# EAGLE board BoB Brain v03 (EAGLE 7.5.0)
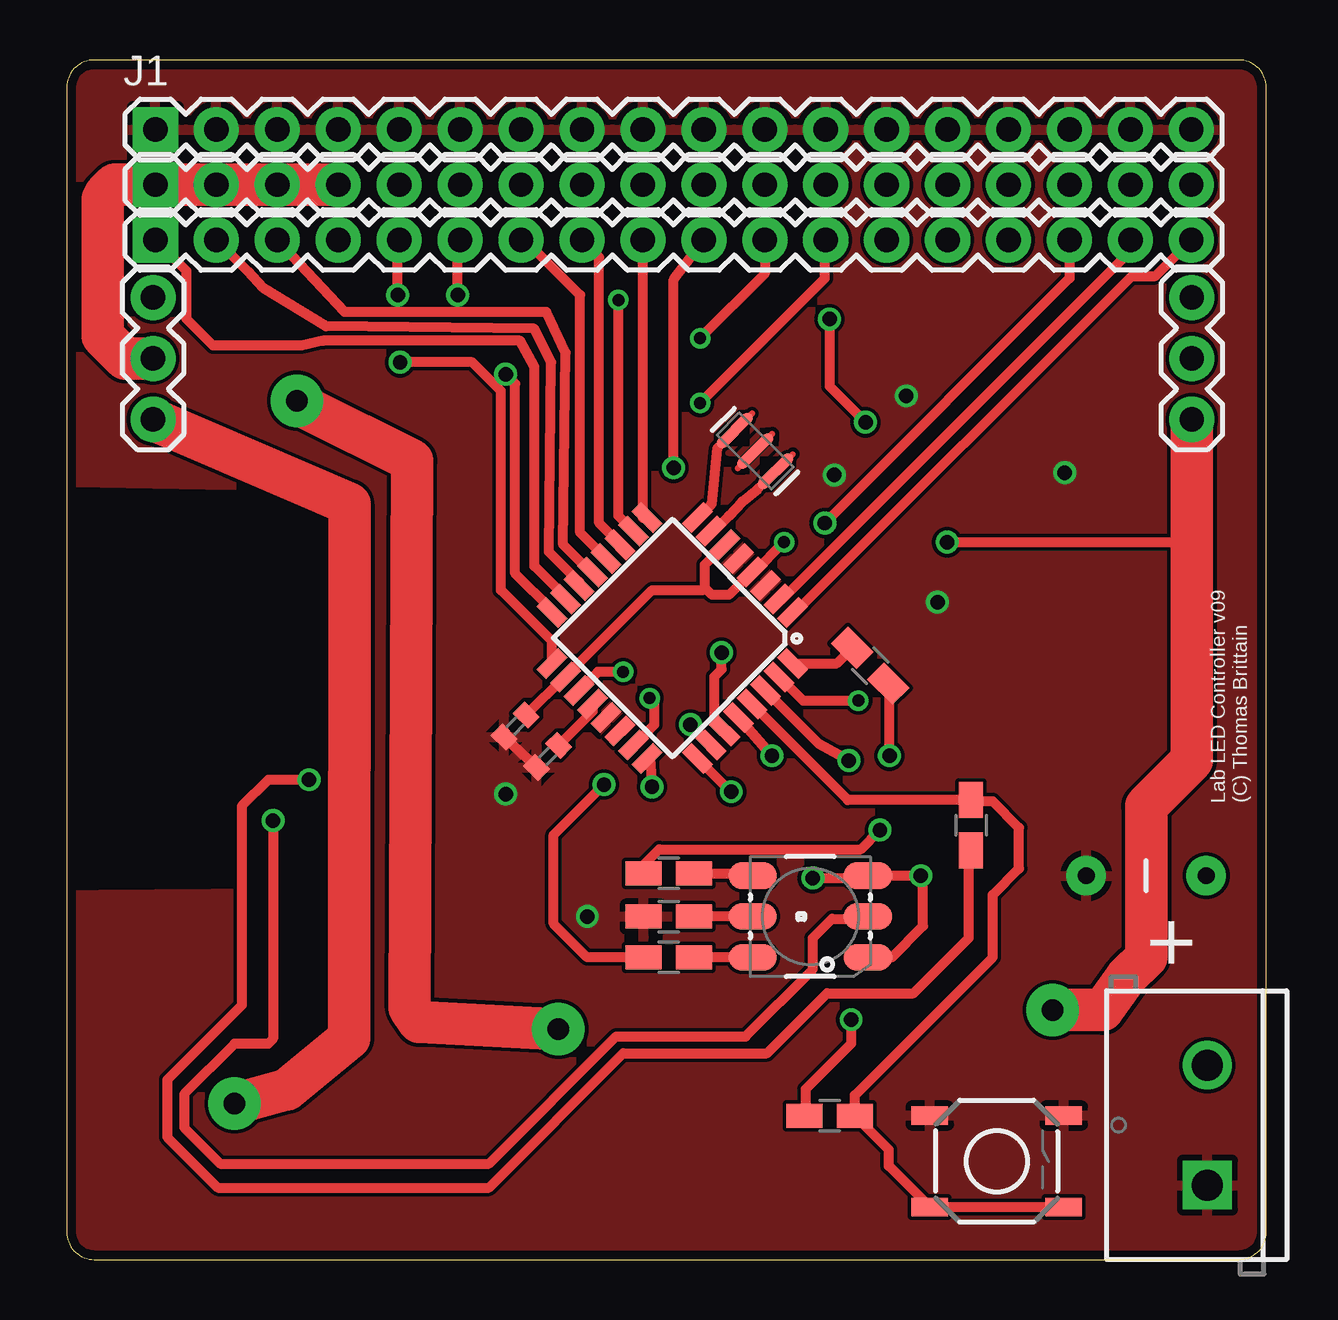
[diagram p0: board, top side]
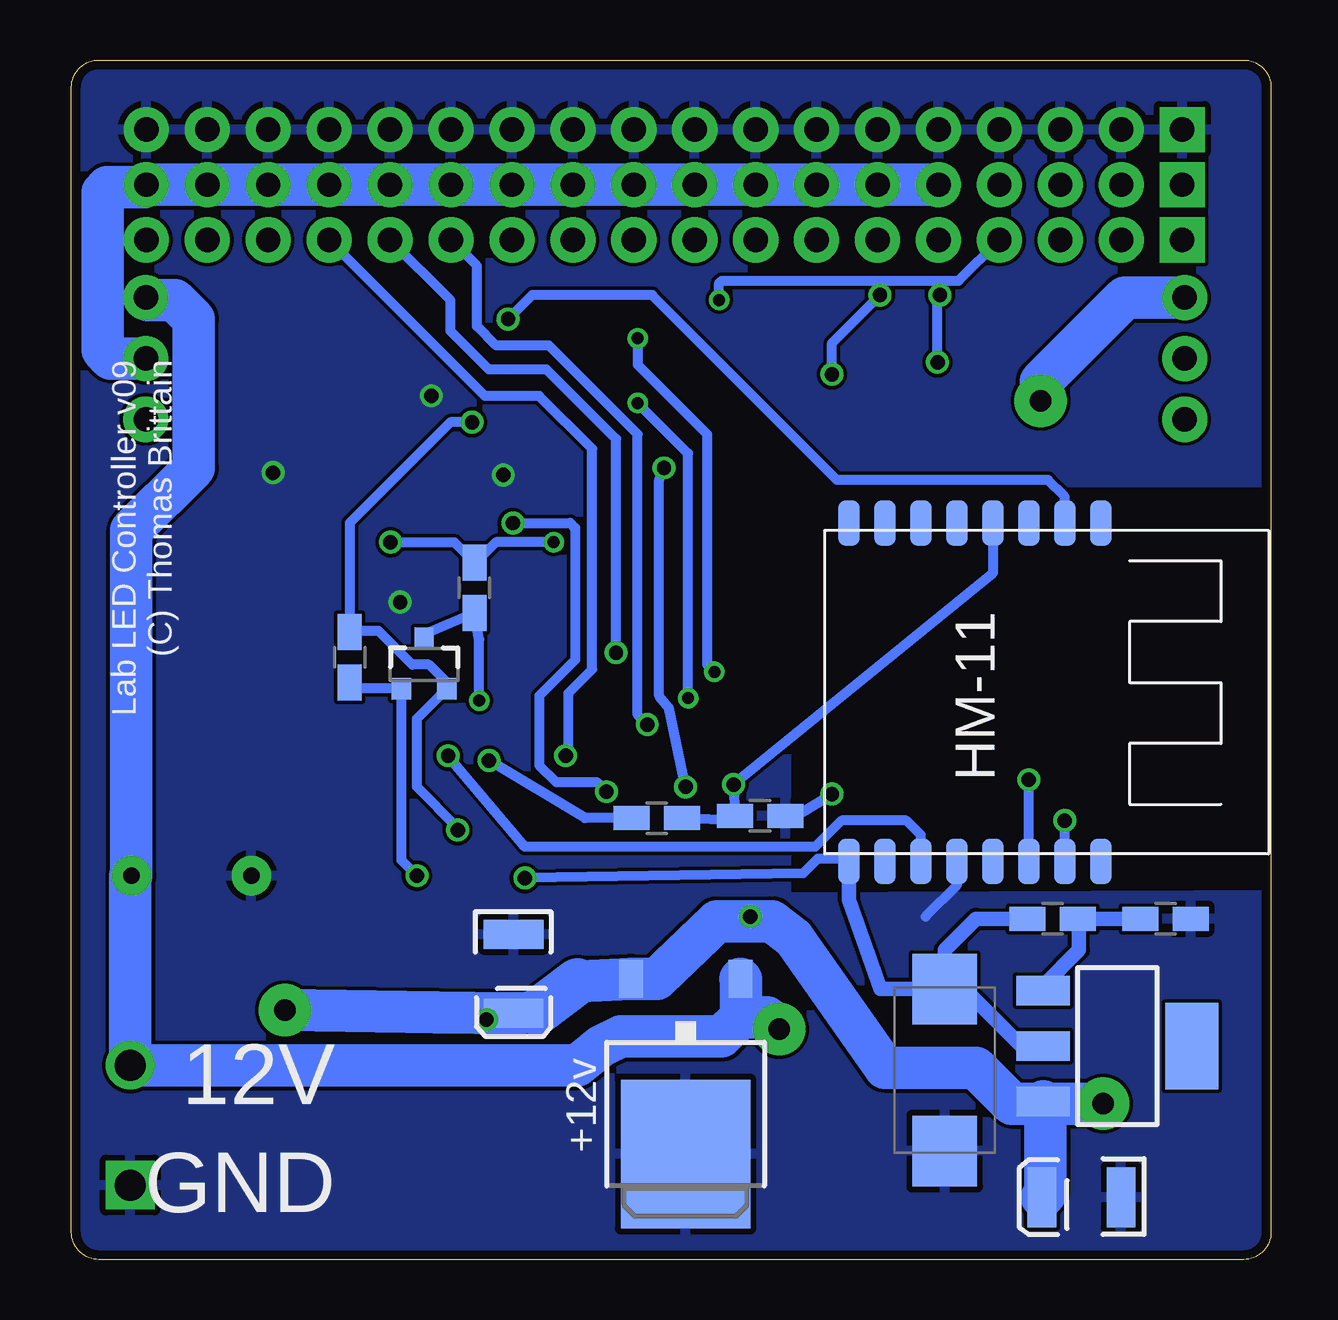
[diagram p1: board, bottom side, seen from below]

Size 50 x 50 mm. Coordinates in mm from the lower left corner, seen from the top.
Outline: 0,48.86 0,1.14 arc90 1.14,0 48.86,0 arc90 50,1.14 50,48.86 arc90 48.86,50 1.14,50 arc90 0,48.86
Copper layers (1*16): Top 0.0356mm / dielectric 1.5011mm / Bottom 0.0356mm
Design rules "LaenPCBOrder": minimum track width 6mil, minimum drill 13mil, track to track 6mil, track to pad 6mil, pad to pad 6mil, via to via 6mil, smd to smd 6mil, copper to edge 15mil, drill to drill 6mil, minimum pad ring 7mil, minimum via ring 7mil, stop-mask expansion 3mil, vias tented up to drill 0mil, thermal gap 10mil

## Footprints (pad centres in the part's own frame; a part is rotated, then mirrored left to right if it is on the bottom)
CAP-PTH-5MM = drill 0.7 pad 1.651: 1 -2.5,0; 2 2.5,0
EIA3528 = smd 1.2 x 2.5: A 1.65,0; C -1.65,0
C0402 = smd 0.7 x 0.9: 1 -0.65,0; 2 0.65,0
D/7343-31W = smd 2.95 x 2.7: + 3.375,0; - -3.375,0
1X18 = drill 1.016 pad 1.88 square: 1 0,0 | drill 1.016 pad 1.88: 2 2.54,0; 3 5.08,0; 4 7.62,0; 5 10.16,0; 6 12.7,0; 7 15.24,0; 8 17.78,0; 9 20.32,0; 10 22.86,0; 11 25.4,0; 12 27.94,0; 13 30.48,0; 14 33.02,0; 15 35.56,0; 16 38.1,0; 17 40.64,0; 18 43.18,0
SCREWTERMINAL-5MM-2 = drill 1.3 pad 2.032 square: 1 0,0 | drill 1.3 pad 2.032: 2 5,0
1X03 = drill 1.016 pad 1.88: 1 0,0; 2 2.54,0; 3 5.08,0
LED-TRICOLOR-5050 = smd 2 x 1.1: 1 -2.4,1.7; 2 -2.4,0; 3 -2.4,-1.7; 4 2.4,-1.7; 5 2.4,0; 6 2.4,1.7
SOT23-3 = smd 0.8 x 0.9: 1 -0.95,-1; 2 0.95,-1; 3 0,1.1
R0805W = smd 1.5 x 1: 1 -1.052,0; 2 1.052,0
TACTILE-SWITCH-SMD = smd 1.524 x 0.762: 1 -2.794,1.905; 2 2.794,1.905; 3 -2.794,-1.905; 4 2.794,-1.905
TQFP32-08 = smd 1.27 x 0.559: 1 -4.293,2.8; 2 -4.293,2; 3 -4.293,1.2; 4 -4.293,0.4; 5 -4.293,-0.4; 6 -4.293,-1.2; 7 -4.293,-2; 8 -4.293,-2.8; 17 4.293,-2.8; 18 4.293,-2; 19 4.293,-1.2; 20 4.293,-0.4; 21 4.293,0.4; 22 4.293,1.2; 23 4.293,2; 24 4.293,2.8 | smd 0.559 x 1.27: 9 -2.8,-4.293; 10 -2,-4.293; 11 -1.2,-4.293; 12 -0.4,-4.293; 13 0.4,-4.293; 14 1.2,-4.293; 15 2,-4.293; 16 2.8,-4.293; 25 2.8,4.293; 26 2,4.293; 27 1.2,4.293; 28 0.4,4.293; 29 -0.4,4.293; 30 -1.2,4.293; 31 -2,4.293; 32 -2.8,4.293
TO-252 = smd 1 x 1.6: 1 -2.28,-4.8; 2 2.28,-4.8 | smd 5.4 x 6.2: 3 0,2.5
SOT223 = smd 1.219 x 2.235: 1 -2.311,-3.099; 2 0,-3.099; 3 2.311,-3.099 | smd 3.6 x 2.2: 4 0,3.099
HM-11 = smd 1.9 x 0.9: 1 -0.3,11.5; 2 -0.3,10; 3 -0.3,8.5; 4 -0.3,7; 5 -0.3,5.5; 6 -0.3,4; 7 -0.3,2.5; 8 -0.3,1; 9 13.8,1; 10 13.8,2.5; 11 13.8,4; 12 13.8,5.5; 13 13.8,7; 14 13.8,8.5; 15 13.8,10; 16 13.8,11.5
RESONATOR-SMD = smd 0.45 x 1.905: 1 -1.2,0; 2 0,0; 3 1.2,0

## Placement (x,y rotation side)
C1  big  [CAP-PTH-5MM]  45,16 180 top
C2  10uF  [EIA3528]  31.56,11.91 270 bottom
C3  0.1uF  [C0402]  20.05,20.97 225 top
C8  0.1uF  [C0402]  18.7,22.24 225 top
C10  10uF  [EIA3528]  7.9,2.6 180 bottom
C11  470uF  [D/7343-31W]  13.6,7.9 90 bottom
J1  [1X18]  3.7,47.1 0 top
J2  [1X18]  3.7,42.5 0 top
J4  [1X18]  3.7,44.8 0 top
JP1  12V_INPUT  [SCREWTERMINAL-5MM-2]  47.55,3.1 90 top
JP5  JUMPER-3PTH  [1X03]  3.6,40.1 270 top
JP6  JUMPER-3PTH  [1X03]  46.9,40.1 270 top
LED1  LED-TRICOLOR-5050NO_IC  [LED-TRICOLOR-5050]  31,14.3 180 top
Q1  MOSFET-NCHANNELAO3404A  [SOT23-3]  35.3,24.8 0 bottom
R1  1K  [R0805W]  33.49,24.75 315 top
R2  1K  [R0805W]  37.7,18.1 90 top
R3  20k  [R0805W]  21.3,18.5 0 bottom
R4  10k  [R0805W]  25.6,18.4 180 bottom
R11  470  [R0805W]  25.1,16.1 0 top
R12  470  [R0805W]  25.1,12.6 0 top
R13  470  [R0805W]  25.1,14.3 180 top
R14  10k  [R0805W]  31.8,6 180 top
R17  220  [R0805W]  9.1,14.2 180 bottom
R18  370  [R0805W]  4.4,14.2 180 bottom
R20  10k  [R0805W]  33.2,28 90 bottom
R22  10k  [R0805W]  38.4,25.1 270 bottom
S1  TAC_SWITCHSMD  [TACTILE-SWITCH-SMD]  38.77,4.1 0 top
U1  ATMEGA328P_TQFP  [TQFP32-08]  25.24,25.91 225 top
U3  +12v  [TO-252]  24.4,6.9 180 bottom
U4  V_REG_317SMD  [SOT223]  6.4,8.9 270 bottom
U$1  HM-11  [HM-11]  18.6,30.4 270 bottom
Y1  16MHZ  [RESONATOR-SMD]  28.7,33.7 135 top

## Library data of the parts
C1 = SparkFun-Passives
C2 C10 = SparkFun-Capacitors
C3 C8 C11 R1-R4 R11-R14 R17 R18 R20 R22 = resistor
J1 J2 J4 = SparkFun-Connectors
JP1 = SparkFun-Connectors; STOREFRONT_ID: PRT-08432
JP5 JP6 = SparkFun-Retired
LED1 = SparkFun-LED
Q1 = SparkFun-DiscreteSemi; PROD_ID: TRAN-12988
S1 = SparkFun-Retired; PROD_ID: SWCH-08247
U1 = SparkFun-DigitalIC; PROD_ID: IC-09069
U3 = SparkFun-PowerIC; PROD_ID: VREG-12370
U4 = SparkFun-PowerIC
U$1 = HM-11-ladvien
Y1 = SparkFun-FreqCtrl; PROD_ID: XTAL-08900

## Nets
3.35V: C11.+ LED1.1 LED1.3 Q1.1 R17.2 R22.2 U4.2 U$1.9
3~: J2.18 U1.1
4: J2.17 U1.2
5~: J2.9 U1.9
6V: J4.5 J4.6 J4.7 J4.8 J4.9 J4.10 J4.11 J4.12 J4.13 J4.14 J4.15 J4.16 J4.17 J4.18 JP6.2
6~: J2.4 U1.10
7: J2.8 U1.11
8: J2.7 U1.12
9~: J2.3 U1.13
10~: J2.2 U1.14
11~: J2.1 U1.15
12: J2.6 U1.16
13: J2.5 U1.17
A0: J2.12 U1.23
A1: J2.10 U1.24
A2: J2.16 U1.25
A3: J2.13 U1.26
A4-SDA: J2.14 U1.27
A5-SCL: J2.15 U1.28
ADC6: J2.11 U1.19
ADC7: U1.22
AREF: C3.1 U1.20
ATMEGA-RESET: R2.1 U$1.14
CONN_LED: LED1.2 U$1.15
GND: C1.2 C2.C C3.2 C8.2 C10.C C11.- J1.1 J1.2 J1.3 J1.4 J1.5 J1.6 J1.7 J1.8 J1.9 J1.10 J1.11 J1.12 J1.13 J1.14 J1.15 J1.16 J1.17 J1.18 JP1.1 R3.2 R13.2 R18.1 S1.1 S1.2 U1.3 U1.5 U1.21 U3.3 U$1.12 Y1.2
HM-RESET: R1.1 U1.32
N$1: LED1.5 R13.1
N$2: U1.7 Y1.1
N$3: LED1.4 R11.2
N$4: LED1.6 R12.2
N$11: U1.8 Y1.3
N$14: R17.1 R18.2 U4.1
PIN_PWR: J4.1 J4.2 J4.3 J4.4 JP5.2
RAW: C1.1 JP1.2 JP5.1 JP6.1 U3.1
RESET: R2.2 R14.1 S1.3 S1.4 U1.29
U1_RX: Q1.3 R20.1 U1.31
U1_TX: R4.2 U1.30
U2-RESET: R1.2 U$1.11
U2_RX: R3.1 R4.1 R12.1 U$1.4
U2_TX: Q1.2 R11.1 R22.1 U$1.2
VCC: C2.A C8.1 C10.A JP5.3 JP6.3 R14.2 R20.2 U1.4 U1.6 U1.18 U3.2 U4.3

## Tracks (layer width: path | path; a pad name or v marks a point on that pad's centre or on a via)
3.35V  (via drill 0.6)
  Top 0.406: v31.1,15.9 33.3,15.9 LED1.3 v35.6,16 35.7,15.9 35.7,13.9 34.4,12.6 LED1.1
  Bottom 0.406: R22.2 38.15,23.8 Q1.1 36.25,16.65 v35.6,16 | 17.7,16.7 18.9,16.7 19.5,16.1 v31.1,15.9
  Bottom 0.61: U4.2 10.4,8.9 12.8,11.3 13.57,11.3 C11.+ | C11.+ 16.27,11.28 17.6,15 U$1.9 | U$1.9 17.6,17 17.7,17.1 17.7,16.7 U$1.9 | C11.+ 13.6,12.9 12.3,14.2 R17.2
3~
  Top 0.406: U1.1 30.36,26.96 44.4,41 45.38,41 J2.18
4
  Top 0.406: U1.2 29.83,27.53 44,41.7 44,42.16 J2.17
5~
  Top 0.406: U1.9 24.02,30.92 J2.9
6V
  Bottom 1.778: JP6.2 48.36,37.56 48.7,37.9 48.7,44.5 48.5,44.7 46.98,44.7 J4.18 J4.17 J4.16 J4.15 J4.14 J4.13 J4.12 J4.11 J4.10 J4.9 J4.8 J4.7 J4.6 J4.5
6~  (via drill 0.5 pad 0.25)
  Top 0.406: U1.10 23.62,30.38 23,31 v23,40
  Bottom 0.406: v23,40 23,40.7 22.9,40.8 13.02,40.8 J2.4
7
  Top 0.406: U1.11 23.06,29.84 22.2,30.7 22.2,41.78 J2.8
8
  Top 0.406: U1.12 22.48,29.23 21.4,30.3 21.4,40.2 19.6,42 19.04,42.4 J2.7
9~
  Top 0.406: U1.13 21.84,28.66 20.7,29.8 20.8,37.8 20,39.5 11.58,39.5 J2.3
10~
  Top 0.406: U1.14 21.36,28.24 20.1,29.5 20.2,37.4 19.5,38.8 10.8,38.9 8.2,40.5 7.54,41.2 J2.2
11~
  Top 0.406: U1.15 20.79,27.61 19.5,28.9 19.5,37.2 18.9,38.3 10.7,38.3 9.8,38.1 6.1,38.1 5,39.2 5,41.2 J2.1
12  (via drill 0.6)
  Top 0.406: U1.16 20.23,27.07 18.7,28.6 18.7,36.5 v18.3,36.9 | v16.3,40.2 16.3,42.4 J2.6
  Bottom 0.406: v18.3,36.9 18.3,38.2 v16.3,40.2
13  (via drill 0.6)
  Top 0.406: U1.17 20.23,25.77 18.1,27.9 18.1,36.2 16.9,37.4 v13.9,37.4 | v13.8,40.2 13.8,42.44 J2.5
  Bottom 0.406: v13.9,37.4 13.9,40.1 v13.8,40.2
A0  (via drill 0.5 pad 0.25)
  Top 0.406: U1.23 23.66,21.46 24.5,22.3 24.5,23.2 v24.3,23.4 | v26.4,35.7 31.6,40.9 31.6,42.46 J2.12
  Bottom 0.406: v24.3,23.4 24.3,33.6 v26.4,35.7
A1  (via drill 0.6)
  Top 0.406: U1.24 24.31,20.89 v24.4,19.7 | v25.3,33 25.3,40.84 J2.10
  Bottom 0.406: v24.4,19.7 25.1,23 25.5,23.5 25.5,32.5 v25.3,33
A2  (via drill 0.6)
  Top 0.406: J2.16 41.8,40.9 v31.6,30.7 | v27.7,19.5 v27.69,19.5 U1.25
  Bottom 0.406: v31.6,30.7 29.2,30.7 29,30.5 29,25 30.5,23.5 30.5,20.6 29.8,19.9 28.1,19.9 v27.7,19.5
A3  (via drill 0.6)
  Top 0.406: U1.26 26.84,21.46 v26,22.3
  Bottom 0.406: v26,22.3 26.4,22.7 26.4,34.4 30.1,38.1 32.3,38.1 33.1,38.9 33.1,41.42 J2.13 34.18,42.08
A4-SDA  (via drill 0.6)
  Top 0.406: U1.27 27,22.45 27,24.3 27.3,24.6 v27.3,25.3
  Bottom 0.406: v27.3,25.3 27.3,34.2 30.2,37.1 32.6,37.1 34.2,38.7 34.2,39.98 J2.14
A5-SCL  (via drill 0.6)
  Top 0.406: U1.28 v29.4,21
  Bottom 0.406: v29.4,21 29.3,21.1 29.3,23.6 28.3,24.6 28.3,33.8 30.5,36 32.76,36 J2.15
ADC6  (via drill 0.5 pad 0.25)
  Top 0.406: J2.11 29.1,41.1 v26.4,38.4 | v23.2,24.5 22.14,24.5 U1.19
  Bottom 0.406: v26.4,38.4 26.4,37.3 23.5,34.4 23.5,24.8 v23.2,24.5
AREF
  Top 0.406: U1.20 21.93,22.85 C3.1
ATMEGA-RESET  (via drill 0.6)
  Top 0.406: v10.1,20 8.4,20 7.3,18.9 7.3,10.6 4.2,7.5 4.2,5.1 6.3,3 17.6,3 23.2,8.6 29.2,8.6 31.7,11.1 35.3,11.1 37.6,13.4 37.6,16.95 R2.1
  Bottom 0.406: U$1.14 v10.1,20
CONN_LED  (via drill 0.6)
  Top 0.406: v8.6,18.3 8.6,9.2 8.4,9 7,9 4.9,6.9 4.9,5.5 6.4,4 17.6,4 22.9,9.3 28.3,9.3 31.1,12.1 31.1,13.4 31.9,14.2 33.3,14.2 LED1.2
  Bottom 0.406: U$1.15 v8.6,18.3
GND  (via drill 0.6)
  Top 0.406: C8.2 C3.2
  Bottom 0.406: U$1.12 13.1,15.6 14.4,14.3 | R3.2 19.8,18.5 v18.3,19.4
  other vias: 21.7,14.3 35,36 41.6,32.8 32,32.7 36.3,27.4
  pour Bottom: -1,51 51,51 51,-2 -1,-2 -1,15.2 20.2,15.1 20.2,32.4 -0.8,32.4 -0.8,32.1
  pour Top: -1,51 51,51 51,-2 -1,-2 -1,15.2 10.7,15.3 10.6,20.6 10.2,32.2 -0.8,32.4 -0.8,32.1
HM-RESET
  Top 0.406: U1.32 32.1,24.85 R1.1
N$1
  Top 0.406: LED1.5 R13.1
N$2
  Top 0.406: U1.7 26.96,30.36 27.6,31 28.16,31.6 28.83,32.13
N$3
  Top 0.406: R11.2 28.5,16.1 LED1.4
N$4
  Top 0.406: LED1.6 R12.2
N$11
  Top 0.406: U1.8 26.9,31.5 27.13,33.83
N$14
  Bottom 0.61: U4.1 9.5,11.4 8,12.9 8,14.15 R17.1 R18.2
PIN_PWR
  Top 1.778: JP5.2 2.44,37.56 1.5,38.5 1.5,44.2 1.6,44.3 1.6,44.4 2,44.8 J4.1 J4.2 J4.3 J4.4
RAW  (via drill 0.9 pad 2.18)
  Top 1.778: v20.5,9.6 14.7,9.9 14.3,10.5 14.4,33.3 10,35.5 v9.6,35.8
  Bottom 1.778: JP6.1 46.8,40 45.7,40 44.9,39.2 44.9,33 47.5,30.4 C1.1 47.55,16 JP1.2 28.9,8.1 27.9,8.9 27.1,9.3 22.9,9.3 22.1,10.1 | v9.6,35.8 9.6,36.6 6.1,40.1 JP5.1 | 22.1,10.1 22.1,11.68 U3.1 | 22.1,10.1 21,10.1 v20.5,9.6
RESET
  Top 0.406: U1.29 32.56,19.15 R2.2 37.75,19.1 38.6,19.1 39.7,18 39.7,16.3 38.6,15.2 38.6,12.6 32.85,6.85 R14.1 | 33.4,5.45 R14.1 | S1.4 S1.3 34.27,3.9 34.27,4.58 R14.1
U1_RX  (via drill 0.5 pad 0.25)
  Top 0.406: U1.31 29.71,24.29 30.7,23.3 v33,23.3
  Bottom 0.406: Q1.3 35.05,26.15 R20.1 33,25.85 v33,23.3
U1_TX  (via drill 0.6)
  Top 0.406: v32.6,20.8 31.35,21.5 U1.30
  Bottom 0.406: R4.2 28.6,18.4 v32.6,20.8
U2-RESET  (via drill 0.6)
  Top 0.406: v34.3,21 34.3,23.95 R1.2
  Bottom 0.406: U$1.11 14.6,17.7 15.2,18.3 17.9,18.3 19,17.2 31.1,17.2 v34.3,21
U2_RX  (via drill 0.6)
  Top 0.406: R12.1 21.7,12.6 20.3,14 20.3,17.7 v22.4,19.8
  Bottom 0.406: R4.1 22.8,18.35 R3.1 v22.4,19.8 11.6,28.6 U$1.4
U2_TX  (via drill 0.6)
  Top 0.406: R11.1 24.05,16.45 24.7,17.1 33.1,17.1 v33.9,17.9 | v31.8,39.2 31.8,36.4 v33.3,34.9
  Bottom 0.406: U$1.2 8.6,31.8 9.3,32.5 18.1,32.5 25.8,40.2 30.8,40.2 v31.8,39.2 | v33.9,17.9 33.9,18 35.6,19.7 35.6,22.55 Q1.2 34.35,24.05 35.1,24.8 35.8,24.8 37.2,26.2 38.35,26.2 R22.1 38.4,30.7 34.2,34.9 v33.3,34.9
VCC  (via drill 0.5 pad 0.25, 0.6, 0.9 pad 2.18)
  Top 0.406: C8.1 20.75,24.29 U1.18 24.4,27.9 26.5,27.9 26.6,28 | 26.6,28 26.9,27.7 27.6,27.7 U1.4 28.66,28.66 v29.9,29.9 | 26.6,28 26.6,28.96 U1.6 | v36.7,29.9 46.4,29.9 46.9,29.4 | v32.7,10 32.7,9 30.8,7.1 30.8,6.05 R14.2
  Top 1.778: JP6.3 46.9,29.4 46.9,20.8 45,18.9 45,12.6 44.2,11.8 43.2,10.4 v41.1,10.4 | JP5.3 11.79,31.5 11.78,9.22 9.2,7.1 v7,6.5
  Bottom 0.406: 32.95,29 R20.2 | v29.9,29.9 32.3,29.9 33.3,28.9 R20.2 | v36.7,29.9 34.05,29.9 R20.2 | 30.62,10.3 32.4,10.3 v32.7,10
  Bottom 1.778: v41.1,10.4 34.81,10.3 C2.A 30.62,10.3 | 28.9,11.6 28.8,11.6 U3.2 25.6,11.7 23.1,14.1 20.8,14.1 19.9,13.4 16.1,8 12.3,8 10.8,6.5 9.59,6.5 U4.3 9.41,6.5 | v7,6.5 9.41,6.5 | 9.41,6.5 9.41,2.74 C10.A
  Bottom 1.93: 28.9,11.6 30.62,10.3

## Text on the board
tNames: Lab LED Controller v09 / (C) Thomas Brittain | +
bNames: Lab LED Controller v09 / (C) Thomas Brittain | 12V | GND